# EAGLE board MainBoard (EAGLE 7.0.0)
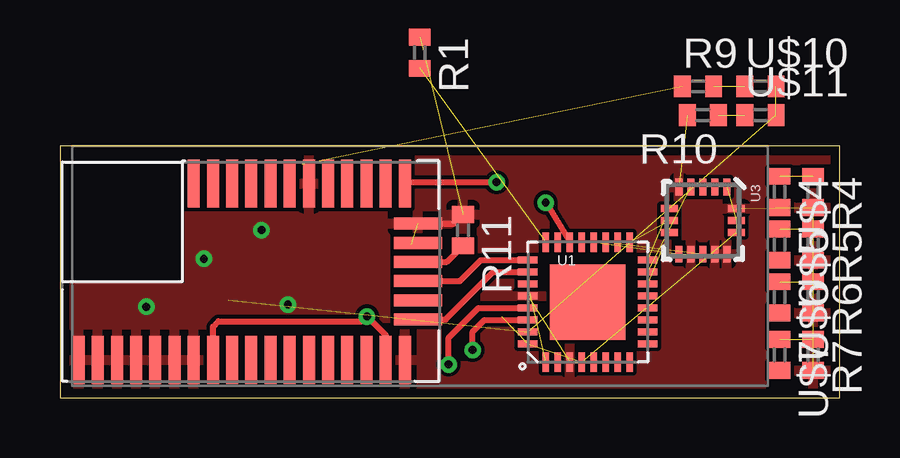
[diagram p0: board, top side]
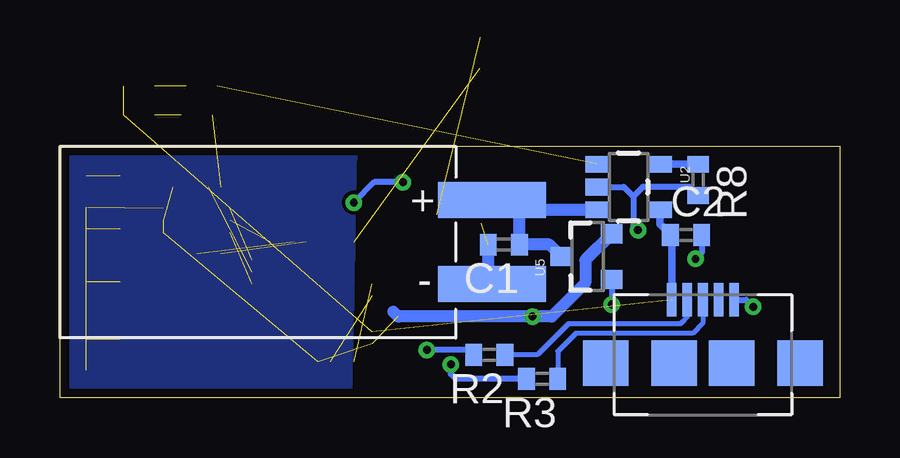
[diagram p1: board, bottom side, seen from below]

Size 32.5 x 10.5 mm. Coordinates in mm from the lower left corner, seen from the top.
Outline: 0,0 32.5,0 32.5,10.5 0,10.5 0,0
Copper layers (1*16): top 0.0356mm / dielectric 1.5011mm / Bottom 0.0356mm
Design rules "LAenPCBOrder": minimum track width 6mil, minimum drill 13mil, track to track 6mil, track to pad 6mil, pad to pad 6mil, via to via 6mil, smd to smd 6mil, copper to edge 15mil, drill to drill 6mil, minimum pad ring 7mil, minimum via ring 7mil, stop-mask expansion 3mil, vias tented up to drill 0mil, thermal gap 10mil

## Footprints (pad centres in the part's own frame; a part is rotated, then mirrored left to right if it is on the bottom)
BLUETOOTHNS = smd 2 x 0.5: P$1 0.9,-0.675; P$2 0.9,-1.475; P$3 0.9,-2.275; P$4 0.9,-3.075; P$5 0.9,-3.875; P$6 0.9,-4.675; P$7 0.9,-5.475; P$8 0.9,-6.275; P$9 0.9,-7.075; P$10 0.9,-7.875; P$11 0.9,-8.675; P$12 0.9,-9.475; P$13 0.9,-10.275; P$14 0.9,-11.075; P$15 0.9,-11.875; P$16 0.9,-12.675; P$17 0.9,-13.475; P$18 0.9,-14.275; P$19 8.25,-5.475; P$20 8.25,-6.275; P$21 8.25,-7.075; P$22 8.25,-7.875; P$23 8.25,-8.675; P$24 8.25,-9.475; P$25 8.25,-10.275; P$26 8.25,-11.075; P$27 8.25,-11.875; P$28 8.25,-12.675; P$29 8.25,-13.475; P$30 8.25,-14.275 | smd 0.5 x 2: P$31 2.575,-14.825; P$32 3.375,-14.825; P$33 4.175,-14.825; P$34 4.975,-14.825; P$35 5.775,-14.825; P$36 6.575,-14.825
LI-POLY_28 = smd 4.5 x 1.5: GND 18,-5.75; VDD 18,-2.25
C0402 = smd 0.7 x 0.9: 1 -0.65,0; 2 0.65,0
MICROUSB = smd 0.4 x 1.4: D+ 0,4.1; D- -0.65,4.1; GND 1.3,4.1; ID 0.65,4.1; VCC -1.3,4.1 | smd 1.9 x 1.9: GD1 -4.05,1.45; GD2 -1.2,1.45; GD3 1.2,1.45; GD4 4.05,1.45
R0402 = smd 0.7 x 0.9: 1 -0.65,0; 2 0.65,0
QFN-32 = smd 0.285 x 0.8: 1 -1.75,-2.5; 2 -1.25,-2.5; 3 -0.75,-2.5; 4 -0.25,-2.5; 5 0.25,-2.5; 6 0.75,-2.5; 7 1.25,-2.5; 8 1.75,-2.5; 17 1.75,2.5; 18 1.25,2.5; 19 0.75,2.5; 20 0.25,2.5; 21 -0.25,2.5; 22 -0.75,2.5; 23 -1.25,2.5; 24 -1.75,2.5 | smd 0.8 x 0.285: 9 2.5,-1.75; 10 2.5,-1.25; 11 2.5,-0.75; 12 2.5,-0.25; 13 2.5,0.25; 14 2.5,0.75; 15 2.5,1.25; 16 2.5,1.75; 25 -2.5,1.75; 26 -2.5,1.25; 27 -2.5,0.75; 28 -2.5,0.25; 29 -2.5,-0.25; 30 -2.5,-0.75; 31 -2.5,-1.25; 32 -2.5,-1.75 | smd 3.15 x 3.15: EP 0,0
SOT23-5 = smd 0.7 x 1: 1 -0.95,-1.3; 2 0,-1.3; 3 0.95,-1.3; 4 0.95,1.3; 5 -0.95,1.3
LGA16-3MM = smd 0.7 x 0.28: 1 -1.4,1; 2 -1.4,0.5; 3 -1.4,0; 4 -1.4,-0.5; 5 -1.4,-1; 9 1.4,-1; 10 1.4,-0.5; 11 1.4,0; 12 1.4,0.5; 13 1.4,1 | smd 0.28 x 0.7: 6 -0.5,-1.4; 7 0,-1.4; 8 0.5,-1.4; 14 0.5,1.4; 15 0,1.4; 16 -0.5,1.4
SOT23-3 = smd 0.8 x 0.9: 1 -0.95,-1; 2 0.95,-1; 3 0,1.1

## Placement (x,y rotation side)
A1  BLE113-A  [BLUETOOTHNS]  0.1,0.7 90 top
BT  LI-POL_BAT  [LI-POLY_28]  32.5,10.5 0 bottom
C1  4.7uF  [C0402]  14,6.4 180 bottom
C2  4.7uF  [C0402]  6.4,6.8 0 bottom
J1  MICROUSB  [MICROUSB]  5.7,0 0 bottom
R1  [R0402]  15,14.4 270 top  (outside the outline)
R2  [R0402]  14.6,1.8 180 bottom
R3  [R0402]  12.4,0.8 180 bottom
R4  [R0402]  31.4,8.6 270 top
R5  [R0402]  31.4,6.4 270 top
R6  [R0402]  31.4,4.2 270 top
R7  [R0402]  31.4,1.8 270 top
R8  67K  [R0402]  5.9,9.1 270 bottom
R9  [R0402]  26.6,13 0 top
R10  [R0402]  26.8,11.8 180 top
R11  [R0402]  16.8,7 270 top
U1  ATMEGA32U2QFN  [QFN-32]  22,4 0 top
U2  MCP738312  [SOT23-5]  8.8,8.8 270 bottom
U3  LIS331  [LGA16-3MM]  26.8,7.4 270 top
U5  REGULATOR  [SOT23-3]  10.5,5.9 90 bottom
U$4  LED_0402  [R0402]  30,8.6 270 top
U$5  LED_0402  [R0402]  30,6.4 270 top
U$6  LED_0402  [R0402]  30,4.2 270 top
U$7  LED_0402  [R0402]  30,1.8 270 top
U$10  LED_0402  [R0402]  29.2,13 0 top
U$11  LED_0402  [R0402]  29.2,11.8 0 top

## Library data of the parts
A1 BT C1 C2 J1 R1-R11 U1 U2 U5 U$4-U$7 U$10 U$11 = BitFit
U3 = SparkFun-Sensors

## Nets
+3V3: A1.P$8 A1.P$17 U1.4 U1.32 U3.1 U3.14 U3.15 U5.2
+5V: C2.1 J1.VCC U1.31 U2.4 U$10.2 U$11.2
GND: A1.P$1 A1.P$2 A1.P$3 A1.P$4 A1.P$5 A1.P$6 A1.P$7 A1.P$18 A1.P$25 A1.P$36 BT.GND C1.2 C2.2 J1.GND R1.1 R4.2 R5.2 R6.2 R7.2 R8.2 R10.2 R11.1 U1.3 U1.28 U2.2 U3.5 U3.10 U3.12 U3.13 U3.16 U5.1
N$1: R3.2 U1.29
N$2: R2.2 U1.30
N$3: R1.2 U1.24
N$4: R4.1 U$4.1
N$5: R5.1 U$5.1
N$6: R6.1 U$6.1
N$7: R7.1 U$7.1
N$8: J1.D+ R3.1
N$9: J1.D- R2.1
N$10: BT.VDD C1.1 U2.3 U5.3
N$11: A1.P$34 R11.2
N$12: R8.1 U2.5
N$13: R9.1 U2.1
N$14: R9.2 U$10.1
N$15: R10.1 U$11.1
N$16: U1.9
N$17: U1.8
N$18: U1.15 U3.4
N$19: U1.14 U3.8
N$20: U1.7
N$21: U1.16 U3.6
N$22: U1.17 U3.7
N$23: U1.19 U3.11
N$24: U1.20 U3.9
N$25: A1.P$31 U1.26
N$26: A1.P$30 U1.22
N$27: A1.P$33 U1.25
N$28: U1.1 U1.27

## Tracks (layer width: path | path; a pad name or v marks a point on that pad's centre or on a via)
+3V3  (via drill 0.33)  (5 unrouted)
  top 0.254: A1.P$8 6.38,2.98 6.6,3.2 12.6,3.2 v12.8,3.4 13.57,2.62 A1.P$17
  Bottom 0.5: U5.2 10.6,5.75 10.6,4.8 12,3.4 v12.8,3.4 18.4,3.4 18.6,3.6
  pour Bottom: 20.2,10.4 32.6,10.4 32.8,0 20.4,0
+5V  (3 unrouted)
  Bottom 0.305: 7,6.95 C2.1 7.5,7.25 U2.4
  Bottom 0.32: J1.VCC 7,6.75 C2.1
GND  (via drill 0.33)  (8 unrouted)
  top 0.254: A1.P$36 16.43,7.28 R11.1
  Bottom 0.254: C2.2 5.75,6.05 v6,5.8 | J1.GND 3.9,4.1 v3.6,3.8 | U5.1 v9.5,3.9 | R8.2 6.25,8.8 8.2,8.8 8.6,8.4 | 8.6,8.4 8.6,7.2 v8.4,7 | U2.2 9,8.8 8.6,8.4
  Bottom 0.5: 14.6,5.2 14.6,4.85 BT.GND 14.65,4.9 C1.2
  pour top: -0.2,4.6 5.4,4.6 5.4,10.6 32.4,10.6 32.4,0 -0.2,0
N$1  (via drill 0.33)
  top 0.254: v16.2,1.4 16.2,2.51 17.44,3.75 U1.29
  Bottom 0.254: R3.2 16,0.8 16.2,1 v16.2,1.4
N$2  (via drill 0.33)
  top 0.254: v17.2,2 17.2,2.76 17.69,3.25 U1.30
  Bottom 0.254: R2.2 15.4,2 v17.2,2
N$3  (1 unrouted)
N$4  (1 unrouted)
N$5  (1 unrouted)
N$6  (1 unrouted)
N$7  (1 unrouted)
N$8
  Bottom 0.203: J1.D+ 5.7,3.12 6.12,2.7 11,2.7 11.75,1.95 R3.1
N$9
  Bottom 0.203: J1.D- 6.35,3.39 6.57,3.16 6.63,3.1 11.3,3.1 12.6,1.8 R2.1
N$10
  Bottom 0.5: 13.4,8 14.25,8 BT.VDD | U2.3 13.6,7.85 | 13.6,7.85 14.1,7.85 BT.VDD | 14.65,8.1 BT.VDD | 13.6,7.85 13.35,7.6 C1.1 12.1,6.4 U5.3
N$11
  top 0.254: A1.P$34 16.12,5.67 R11.2
N$12
  Bottom 0.32: R8.1 U2.5
N$13  (1 unrouted)
N$14  (1 unrouted)
N$15  (1 unrouted)
N$18  (1 unrouted)
N$19  (1 unrouted)
N$21  (1 unrouted)
N$22  (1 unrouted)
N$23  (1 unrouted)
N$24  (1 unrouted)
N$25
  top 0.254: A1.P$31 16.07,3.27 18.05,5.25 U1.26
N$26  (via drill 0.33)
  top 0.254: A1.P$30 14.43,9 v18.2,9 | v20.25,8.15 U1.22
  Bottom 0.254: v18.2,9 19.4,9 v20.25,8.15
N$27
  top 0.254: A1.P$33 16.68,4.88 17.55,5.75 U1.25
N$28  (1 unrouted)